# Altium PCB Tigershark 3D R1.2.PcbDoc (part 2 of 3)
Units mil, origin at the board's own origin, x right, y up, seen from the top; angles counter-clockwise.
Board outline 6000 x 4500 mil, 4 copper layers (Top Layer, Groun Plane, Power Plane, Bottom Layer); 257 components, 247 nets, 1014 pads, 620 vias.
Unrouted connection lines stored in the file: 332.
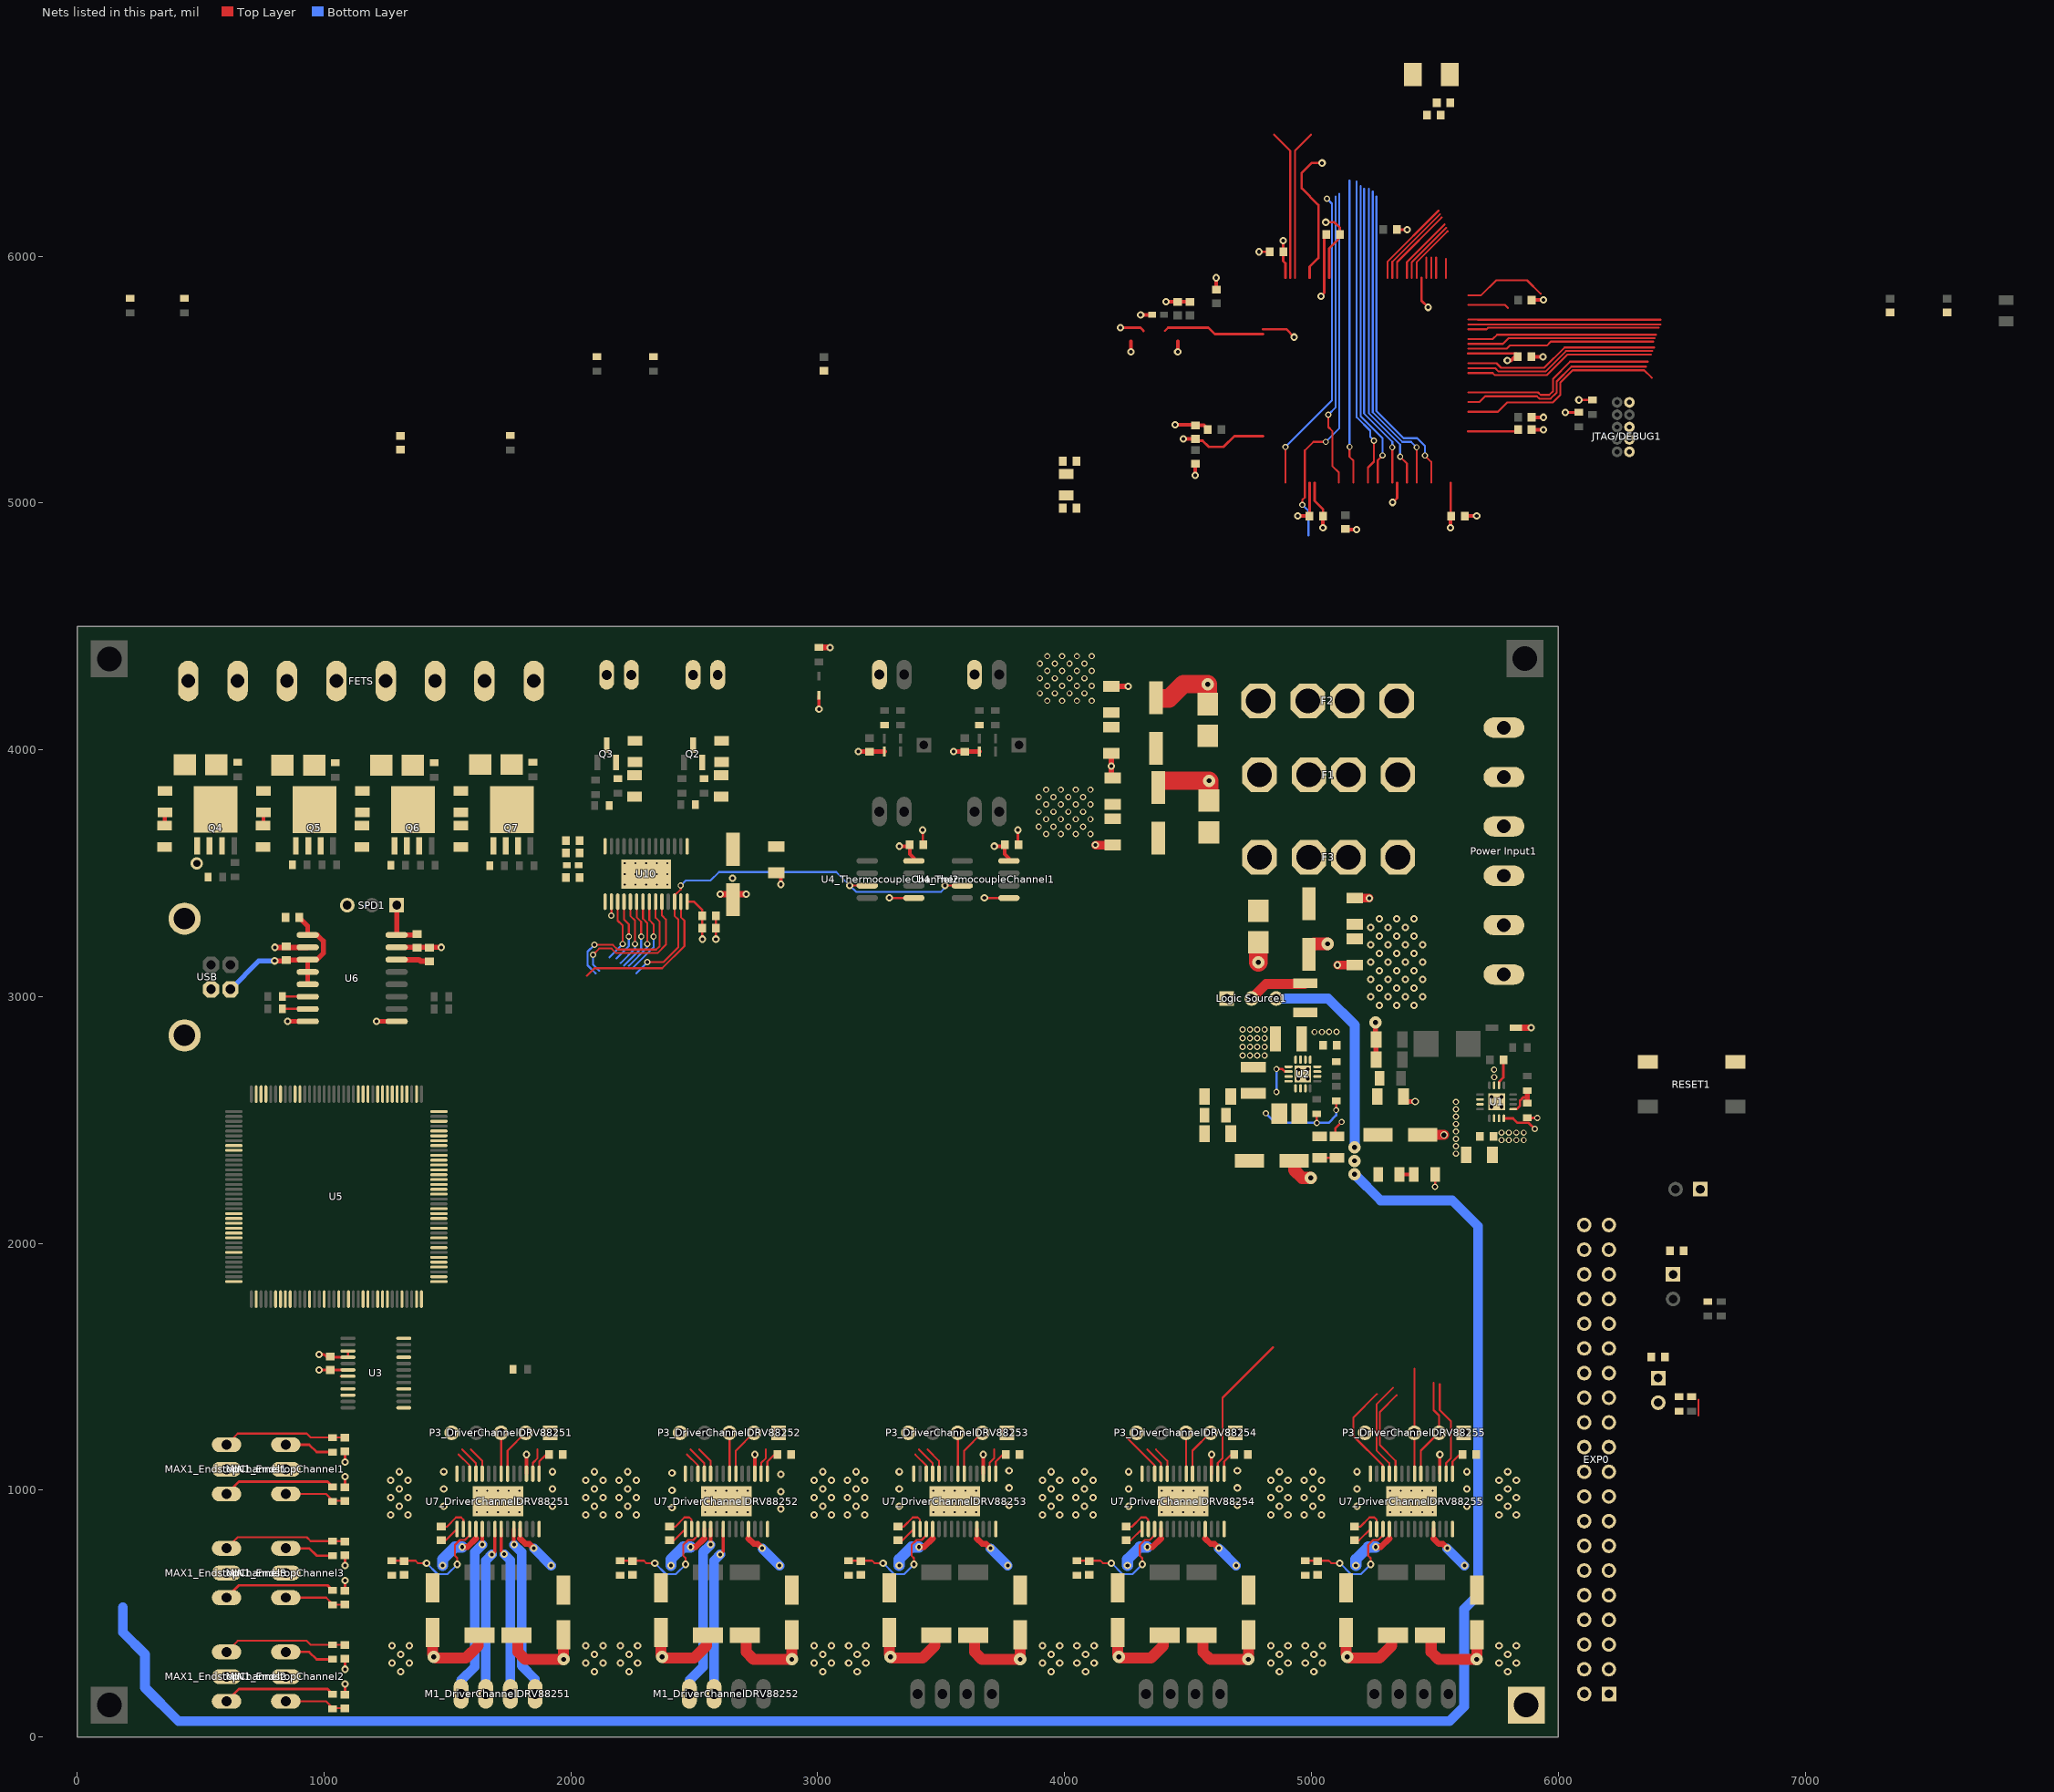
[diagram p4: the nets of this part, all layers, seen from the top]

## Via types
v1: diameter 30, hole 15, Top Layer to Bottom Layer, 351 vias
v2: diameter 25, hole 15, Top Layer to Bottom Layer, 156 vias
v3: diameter 19.68, hole 7.87, Top Layer to Bottom Layer, 90 vias
v4: diameter 50, hole 20, Top Layer to Bottom Layer, 19 vias
v5: diameter 30, hole 20, Top Layer to Bottom Layer, 3 vias
v6: diameter 50, hole 28, Top Layer to Bottom Layer, 1 vias

## Nets (pads, with @x,y where several pads share a name; then routed paths per layer and width w, separated by ;. In a path a pad name is that pad's centre, name@x,y a point inside that pad or via, vN(x,y) a via of type N, cw(c..) or ccw(c..) an arc to the next point about the centre after c; other vN are vias at no path point)
3.3VCC: 1.1 C13.2 C23.1 C25.2 C26.1 C31_ThermocoupleChannel1.2 C31_ThermocoupleChannel2.2 C35.1 C45.2 C46.2 C47.2 C48.2 C49.2 C50.2 C51.2 C60.2 C61.2 C62.2 C64.2 EXP0.5 EXP0.7 FB3.2 FB5.1 FB9.1 JTAG/DEBUG1.1@6288.26,5208.02 MAX1_EndstopChannel1.3 MAX1_EndstopChannel2.3 MAX1_EndstopChannel3.3 MIN1_EndstopChannel1.3 MIN1_EndstopChannel2.3 MIN1_EndstopChannel3.3 P3_DriverChannelDRV88251.1 P3_DriverChannelDRV88252.1 P3_DriverChannelDRV88253.1 P3_DriverChannelDRV88254.1 P3_DriverChannelDRV88255.1 R2_EndstopChannel1.1 R2_EndstopChannel2.1 R2_EndstopChannel3.1 R3_EndstopChannel1.1 R3_EndstopChannel2.1 R3_EndstopChannel3.1 R11.2 R13_ThermistorChannel1.2 R13_ThermistorChannel2.2 R21.2 R24.2 R25.2 R26.2 R27.2 TRST1.1 U3.6 U4_ThermocoupleChannel1.4 U4_ThermocoupleChannel2.4 U5.30 U5.43 U5.72 U5.80 U5.96 U5.134 U5.143 U7_DriverChannelDRV88251.17 U7_DriverChannelDRV88252.17 U7_DriverChannelDRV88253.17 U7_DriverChannelDRV88254.17 U7_DriverChannelDRV88255.17 U10.28 | length 4767.4
  Top Layer w10: MAX1_EndstopChannel2.3@605,145 655,195 1014.05,195 R2_EndstopChannel2.1@1035,174.05 ; MAX1_EndstopChannel3.3@605,565 655,615 1014.05,615 R2_EndstopChannel3.1@1035,594.05 ; MAX1_EndstopChannel1.3@605,985 655,1035 1014.05,1035 R2_EndstopChannel1.1@1035,1014.05 ; MIN1_EndstopChannel2.3@845,345 940,345 970,315 R3_EndstopChannel2.1@1035,315 ; MIN1_EndstopChannel3.3@845,765 940,765 970,735 R3_EndstopChannel3.1@1035,735 ; MIN1_EndstopChannel1.3@845,1185 940,1185 970,1155 R3_EndstopChannel1.1@1035,1155 ; v1(980,1487.8) U3.6@1096.81,1487.8 ; U10.28@2471.18,3385 2498.11,3385 2532.28,3350.83 v1(2532.28,3233.27) ; v1(4225.82,5710.58) 4268.26,5710.58 4307.39,5710.58 4319.95,5698.02 ; C45.2@4524.36,5252.67 4559.36,5252.67 4584.36,5227.67 4644.36,5227.67 4687.98,5271.29 4804,5271.29 ; v1(4885.82,6063.02) 4885.82,5980.46 4894.56,5971.72 4894.56,5913.02 ; C48.2@4992.98,4947.67 4992.98,5082.31 ; v1(5058.26,6138.02) 5093.26,6138.02 5115.82,6115.46 C51.2@5115.82,6088.02 5115.82,6075.58 5071.72,6031.49 5071.72,5913.02 ; C50.2@5563.85,4947.67 5563.85,5082.31 ; 5634.71,5290.98 5830.11,5290.98 C47.2@5836.8,5297.67 ; 5634.71,5605.94 C46.2@5830.11,5605.94 ; v1(6028.73,5367.55) R26.2@6083.26,5367.55 ; v1(6083.26,5418.02) 6137.78,5418.02 R27.2@6138.26,5417.55
  Top Layer w14: U7_DriverChannelDRV88251.17@1820,1067.36 v1(1820,1145) ; U7_DriverChannelDRV88252.17@2745,1067.36 v1(2745,1145) ; U7_DriverChannelDRV88253.17@3670,1067.36 v1(3670,1145) ; U7_DriverChannelDRV88254.17@4595,1067.36 v1(4595,1145) ; U7_DriverChannelDRV88255.17@5520,1067.36 v1(5520,1145)
  Top Layer w15: v1(3330.51,3610) 3372.95,3610 3372.95,3577.56 3389.49,3561.02 U4_ThermocoupleChannel2.4@3389.49,3550 ; v1(3715.51,3610) 3757.95,3610 3757.95,3577.56 3774.49,3561.02 U4_ThermocoupleChannel1.4@3774.49,3550 ; v1(4308.26,5763.02) FB5.1@4354.63,5763.02 ; v1(4481.8,5260.11) C45.2@4529.36,5260.11 ; v1(4944.24,4947.67) C48.2@4991.8,4947.67 ; v1(5563.85,4900.11) C50.2@5563.85,4947.67 ; v1(5793.26,5578.02) 5808.26,5578.02 5823.26,5593.02 C46.2@5835.7,5593.02
+5VCC: "Logic Source1.3" C9.1 C34.1 EXP0.1 EXP0.3 FB2.2 R8.2 | length 9199.9
  Bottom Layer w40: 185,525 185,425 275,335 275,200 410,65 5560,65 5619,124 5619,519 5675,575 5675,2070 5570,2175 5280,2175 v4(5175,2280) ; 4857.45,2992.55 5067.45,2992.55 5175,2885 v4(5175,2390)
  other v4: 5175,2335
+12VCC1: C10.2 C11.2 C16.1 C18.2 C19.2 C66_DriverChannelDRV88251.1 C66_DriverChannelDRV88252.1 C66_DriverChannelDRV88253.1 C66_DriverChannelDRV88254.1 C66_DriverChannelDRV88255.1 C69_DriverChannelDRV88251.1 C69_DriverChannelDRV88252.1 C69_DriverChannelDRV88253.1 C69_DriverChannelDRV88254.1 C69_DriverChannelDRV88255.1 C70_DriverChannelDRV88251.1 C70_DriverChannelDRV88252.1 C70_DriverChannelDRV88253.1 C70_DriverChannelDRV88254.1 C70_DriverChannelDRV88255.1 D8.2 F3.2 R30_DriverChannelDRV88251.1 R30_DriverChannelDRV88252.1 R30_DriverChannelDRV88253.1 R30_DriverChannelDRV88254.1 R30_DriverChannelDRV88255.1 R31.2 U1.2 U1.3 U1.11 U7_DriverChannelDRV88251.4 U7_DriverChannelDRV88251.11 U7_DriverChannelDRV88252.4 U7_DriverChannelDRV88252.11 U7_DriverChannelDRV88253.4 U7_DriverChannelDRV88253.11 U7_DriverChannelDRV88254.4 U7_DriverChannelDRV88254.11 U7_DriverChannelDRV88255.4 U7_DriverChannelDRV88255.11 | length 2214.5
  Top Layer w14: 1615.43,804.43 U7_DriverChannelDRV88251.4@1615.43,842.8 ; 1794.57,804.43 U7_DriverChannelDRV88251.11@1794.57,842.8 ; 2540.43,804.43 U7_DriverChannelDRV88252.4@2540.43,842.8 ; 2719.57,804.43 U7_DriverChannelDRV88252.11@2719.57,842.8 ; 3465.43,804.43 U7_DriverChannelDRV88253.4@3465.43,842.8 ; 3644.57,804.43 U7_DriverChannelDRV88253.11@3644.57,842.8 ; 4390.43,804.43 U7_DriverChannelDRV88254.4@4390.43,842.8 ; 4569.57,804.43 U7_DriverChannelDRV88254.11@4569.57,842.8 ; 5315.43,804.43 U7_DriverChannelDRV88255.4@5315.43,842.8 ; 5494.57,804.43 U7_DriverChannelDRV88255.11@5494.57,842.8
  Top Layer w25: v1(1560,770) 1581,770 1615.43,804.43 ; 1794.57,804.43 1816,783 1832,783 v1(1850,765) ; v1(2485,770) 2506,770 2540.43,804.43 ; 2719.57,804.43 2741,783 2757,783 v1(2775,765) ; v1(3410,770) 3431,770 3465.43,804.43 ; 3644.57,804.43 3666,783 3682,783 v1(3700,765) ; v1(4335,770) 4356,770 4390.43,804.43 ; 4569.57,804.43 4591,783 4607,783 v1(4625,765) ; v1(5260,770) 5281,770 5315.43,804.43 ; 5494.57,804.43 5516,783 5532,783 v1(5550,765)
  Bottom Layer w39: v1(1850,765) v1(1920,695) ; v1(2775,765) v1(2845,695) ; v1(3700,765) v1(3770,695) ; v1(4625,765) v1(4695,695) ; v1(5550,765) v1(5620,695)
  Bottom Layer w45: v1(1480,695) 1480,720 1530,770 v1(1560,770) ; v1(2405,695) 2405,720 2455,770 v1(2485,770) ; v1(3330,695) 3330,720 3380,770 v1(3410,770) ; v1(4255,695) 4255,720 4305,770 v1(4335,770) ; v1(5180,695) 5180,720 5230,770 v1(5260,770)
  other v1: 1310,265 2095,265 2235,265 3020,265 3160,265 3945,265 4085,265 4870,265 5010,265 5795,265 1275,300 1345,300 2060,300 2130,300 2200,300 2270,300 2985,300 3055,300 3125,300 3195,300 3910,300 3980,300 4050,300 4120,300 4835,300 4905,300 4975,300 5045,300 5760,300 5830,300 1310,335 2095,335 2235,335 3020,335 3160,335 3945,335 4085,335 4870,335 5010,335 5795,335 1275,370 1345,370 2060,370 2130,370 2200,370 2270,370 2985,370 3055,370 3125,370 3195,370 3910,370 3980,370 4050,370 4120,370 4835,370 4905,370 4975,370 5045,370 5760,370 5830,370 5275,2965 5345,2965 5415,2965 5240,3000 5310,3000 5380,3000 5450,3000 5275,3035 5345,3035 5415,3035 5240,3070 5310,3070 5380,3070 5450,3070 5275,3105 5345,3105 5415,3105 5240,3140 5310,3140 5380,3140 5450,3140 5275,3175 5345,3175 5415,3175 5240,3210 5310,3210 5380,3210 5450,3210 5275,3245 5345,3245 5415,3245 5240,3280 5310,3280 5380,3280 5275,3315 5345,3315 5415,3315
  other v2: 5770,2419 5800,2419 5830,2419 5860,2419 5770,2449 5800,2449 5830,2449 5860,2449 5740.16,2674 5740,2704
+12VCC2: C3.1 C5.2 C6.2 C27.2 C28.1 D4.2 D15.2 D17.2 D19.2 F2.2 FAN-1.1 FAN-2.1 FETS.3 FETS.5 FETS.7 R1.2 R13.1 R47.1 R60.2 R64.2 R68.2 U10.1 | length 45.2
  Top Layer w8: R1.2@3005,4414.53 R1.2@3005.47,4415
  Top Layer w25: R1.2@3005.47,4415 v1(3050,4415)
  other v2: 3930,4199 3990,4199 4050,4199 4110,4199 3900,4229 3960,4229 4020,4229 4080,4229 3930,4259 3990,4259 4050,4259 4110,4259 3900,4290 3960,4290 4020,4290 4080,4290 3930,4320 3990,4320 4050,4320 4110,4320 3900,4350 3960,4350 4020,4350 4080,4350 3930,4380 3990,4380 4050,4380 4110,4380
+12VCC3: C12.1 C14.2 C15.2 D6.2 D12.2 F1.2 FETS.1 R56.2
  other v2: 3925,3659 3985,3659 4045,3659 4105,3659 3895,3689 3955,3689 4015,3689 4075,3689 3925,3719 3985,3719 4045,3719 4105,3719 3895,3749 3955,3749 4015,3749 4075,3749 3925,3779 3985,3779 4045,3779 4105,3779 3895,3809 3955,3809 4015,3809 4075,3809 3925,3839 3985,3839 4045,3839 4105,3839
ADC_TRIGGER: U5.36
ATSAM_SS: U5.64
AVREF: C65.2 FB9.2 U5.9 | length 413.4
  Top Layer w8: 4406.56,5698.02 4419.12,5710.58
  Top Layer w10: 4419.12,5710.58 4458.26,5710.58 4582.7,5710.58 4608.61,5684.68 4804,5684.68
BED_PWM: U5.52 U10.17 | length 1487.9
  Top Layer w8: U10.17@2189.68,3385 2189.68,3308.43 2209.84,3288.27 v2(2209.84,3213.27) ; v2(5154.36,5227.67) 5154.36,5187.67 5170.15,5171.88 5170.15,5082.31
  Bottom Layer w8: 2156.1,3159.53 v2(2209.84,3213.27) ; v2(5154.36,5227.67) 5154.36,6307.55
BST: C7.2 U1.10 | length 110.4
  Top Layer w10: U1.10@5759.84,2640.93 5759.84,2654.59 5777.56,2672.3 C7.2@5777.56,2744
DIR1: P3_DriverChannelDRV88251.2 U5.78 U7_DriverChannelDRV88251.20 | length 198.5
  Top Layer w8: U7_DriverChannelDRV88251.20@1743.39,1067.2 1743.39,1160.89 P3_DriverChannelDRV88251.2@1817.5,1235
DIR2: P3_DriverChannelDRV88252.2 U5.93 U7_DriverChannelDRV88252.20 | length 985.4
  Top Layer w8: U7_DriverChannelDRV88252.20@2668.39,1067.2 2668.39,1160.89 P3_DriverChannelDRV88252.2@2742.5,1235 ; 5634.71,5546.88 5744.4,5546.88 5758.26,5533.02 5948.06,5533.02 6031.06,5616.02 6381.47,5616.02
DIR3: P3_DriverChannelDRV88253.2 U5.102 U7_DriverChannelDRV88253.20 | length 977.2
  Top Layer w8: U7_DriverChannelDRV88253.20@3593.39,1067.2 3593.39,1160.89 P3_DriverChannelDRV88253.2@3667.5,1235 ; 5634.71,5724.05 6413.45,5724.05
DIR4: P3_DriverChannelDRV88254.2 U5.113 U7_DriverChannelDRV88254.20 | length 280.1
  Top Layer w8: U7_DriverChannelDRV88254.20@4518.39,1067.2 4518.39,1160.89 P3_DriverChannelDRV88254.2@4592.5,1235 ; 5485.11,5913.02 5485.11,5994.67
DIR5: P3_DriverChannelDRV88255.2 U5.121 U7_DriverChannelDRV88255.20 | length 747.3
  Top Layer w8: 5327.63,5913.02 5327.63,5977.39 5521.26,6171.02 ; U7_DriverChannelDRV88255.20@5443.39,1067.2 5443.39,1160.89 P3_DriverChannelDRV88255.2@5517,1234.5 ; 5495,1435.2 5495,1325 5517,1303 P3_DriverChannelDRV88255.2@5517,1234.5 ; P3_DriverChannelDRV88255.2@5517,1233 P3_DriverChannelDRV88255.2@5517,1234.5
DM_N: R18.1 U6.6 | length 101.4
  Top Layer w10: R18.1@831.53,3001 U6.6@932.88,3001
DP_P: R20.1 U6.7 | length 101.4
  Top Layer w8: R20.1@831.53,2951 U6.7@932.88,2951
DRV_RESET1: U5.82 U7_DriverChannelDRV88251.16 | length 105.8
  Top Layer w8: U7_DriverChannelDRV88251.16@1845.75,1067.2 1845.75,1110.75 1865,1130 1865,1165
DRV_RESET2: U5.94 U7_DriverChannelDRV88252.16 | length 901.4
  Top Layer w8: U7_DriverChannelDRV88252.16@2770.75,1067.2 2770.75,1110.75 2790,1130 2790,1165 ; 5634.71,5566.57 5749.71,5566.57 5768.26,5548.02 5943.26,5548.02 6025.26,5630.02 6388.68,5630.02
DRV_RESET3: U5.103 U7_DriverChannelDRV88253.16 | length 885.6
  Top Layer w8: U7_DriverChannelDRV88253.16@3695.75,1067.2 3695.75,1110.75 3715,1130 3715,1165 ; 5634.71,5743.73 5673.97,5743.73 5674.67,5743.02 6414.27,5743.02
DRV_RESET4: U5.114 U7_DriverChannelDRV88254.16 | length 687.8
  Top Layer w8: U7_DriverChannelDRV88254.16@4620.75,1067.2 4620.75,1110.75 4640,1130 4640,1375 4845,1580 ; 5465.42,5913.02 5465.42,5995.19
DRV_RESET5: U5.122 U7_DriverChannelDRV88255.16 | length 747.3
  Top Layer w8: 5307.94,5913.02 5307.94,5977.71 5515.26,6185.02 ; 5520,1430 5520,1325 5565,1280 5565,1130 5545.75,1110.75 U7_DriverChannelDRV88255.16@5545.75,1067.2
EN1: P3_DriverChannelDRV88251.3 U5.76 U7_DriverChannelDRV88251.21 | length 165.8
  Top Layer w8: U7_DriverChannelDRV88251.21@1717.8,1067.2 P3_DriverChannelDRV88251.3@1717.8,1233
EN2: P3_DriverChannelDRV88252.3 U5.92 U7_DriverChannelDRV88252.21 | length 944.4
  Top Layer w8: U7_DriverChannelDRV88252.21@2642.8,1067.2 P3_DriverChannelDRV88252.3@2642.8,1233 ; 5634.71,5527.2 5734.08,5527.2 5743.26,5518.02 5952.85,5518.02 6036.85,5602.02 6374.77,5602.02
EN3: P3_DriverChannelDRV88253.3 U5.101 U7_DriverChannelDRV88253.21 | length 941.1
  Top Layer w8: U7_DriverChannelDRV88253.21@3567.8,1067.2 P3_DriverChannelDRV88253.3@3567.8,1233 ; 5634.71,5704.36 5709.59,5704.36 5715.28,5710.05 6407.65,5710.05
EN4: P3_DriverChannelDRV88254.3 U5.112 U7_DriverChannelDRV88254.21 | length 247.3
  Top Layer w8: U7_DriverChannelDRV88254.21@4492.8,1067.2 P3_DriverChannelDRV88254.3@4492.8,1233 ; 5504.79,5913.02 5504.79,5994.56
EN5: P3_DriverChannelDRV88255.3 U5.120 U7_DriverChannelDRV88255.21 | length 744.8
  Top Layer w8: 5347.31,5913.02 5347.31,5976.88 5527.46,6157.02 ; P3_DriverChannelDRV88255.3@5417,1233 5417,1493.4 ; U7_DriverChannelDRV88255.21@5417.8,1067.2 P3_DriverChannelDRV88255.3@5417.8,1233
ERASE: U5.87
EXP_CS: U5.45
FB: R7.1 R10.2 U1.5 | length 134.9
  Top Layer w10: U1.5@5816.93,2544.47 5830.59,2544.47 5845,2558.89 5845,2579 5857.74,2591.74 5875,2591.74
  Top Layer w20: R10.2@5875,2569 R7.1@5875,2614.47
FET_CS: U5.49 U10.23 | length 1796.4
  Top Layer w8: v2(2095,3210) 2170,3210 2189.23,3190.77 2345.77,3190.77 2359.84,3204.84 2359.84,3303.27 2343.23,3319.88 U10.23@2343.23,3385 ; v2(5068.26,5358.02) 5068.26,5308.02 5084.36,5291.92 5084.36,5150.7 5111.09,5123.97 5111.09,5082.31
  Bottom Layer w8: v2(2095,3210) 2067.5,3182.5 2067.5,3127.5 2100,3095 ; v2(5068.26,5358.02) 5098.26,5388.02 5098.26,6243.02
FET_PWM1: U5.65 U10.22 | length 1587.4
  Top Layer w8: U10.22@2317.64,3385 2317.64,3310.47 2334.84,3293.27 v2(2334.84,3243.27) ; 5426.05,5082.31 v2(5426.05,5225.98)
  Bottom Layer w8: 2250,3115 2334.84,3199.84 v2(2334.84,3243.27) ; 5248.26,6263.02 5248.26,5368.22 5368.46,5248.02 5404,5248.02 v2(5426.05,5225.98)
FET_PWM2: U5.63 U10.21 | length 1552.6
  Top Layer w8: U10.21@2292.05,3385 2292.05,3316.26 2309.84,3298.47 v2(2309.84,3213.27) ; v2(5359.36,5187.67) 5386.68,5160.35 5386.68,5082.31
  Bottom Layer w8: 2235,3125 2309.84,3199.84 v2(2309.84,3213.27) ; 5233.26,6273.02 5233.26,5363.02 5359.36,5236.92 v2(5359.36,5187.67)
FET_PWM3: U5.60 U10.20 | length 1534.6
  Top Layer w8: U10.20@2266.46,3385 2266.46,3322.06 2284.84,3303.67 v2(2284.84,3243.27) ; 5327.63,5082.31 v2(5327.63,5225.94)
  Bottom Layer w8: 2215,3125.47 2284.84,3195.32 v2(2284.84,3243.27) ; 5213.26,6273.5 5213.26,5363.02 5327.63,5248.65 v2(5327.63,5225.94)
FET_PWM4: U5.57 U10.19 | length 1528
  Top Layer w8: U10.19@2240.87,3385 2240.87,3327.85 2259.84,3308.87 v2(2259.84,3213.27) ; 5268.57,5082.31 5268.57,5173.34 v2(5288.26,5193.02)
  Bottom Layer w8: 2201,3136 2259.84,3194.84 v2(2259.84,3213.27) ; 5199.26,6284.02 5199.26,5352.02 5288.26,5263.02 v2(5288.26,5193.02)
FET_PWM5: U5.55 U10.18 | length 1518.4
  Top Layer w8: U10.18@2215.28,3385 2215.28,3312.83 2234.84,3293.27 v2(2234.84,3243.27) ; 5229.2,5082.31 5229.2,5143.97 5253.26,5168.02 v2(5253.26,5253.02)
  Bottom Layer w8: 2185,3155 2234.84,3204.84 v2(2234.84,3243.27) ; 5183.26,6303.02 5183.26,5348.02 5238.26,5293.02 5238.26,5268.02 v2(5253.26,5253.02)
FET_RESET: U5.38 U10.27 | length 1867.6
  Top Layer w8: 2065,3085 2095,3115 2369.8,3115 2459.84,3205.04 2459.84,3308.27 2445.59,3322.52 U10.27@2445.59,3385 ; 4894.56,5082.31 v2(4894.56,5227.47)
  Bottom Layer w8: v2(4894.56,5227.47) 5083.26,5416.17 5083.26,6213.02 v2(5063.26,6233.02)
GND: "Power Input1.2" "Power Input1.4" "Power Input1.6" C1_EndstopChannel1.2 C1_EndstopChannel2.2 C1_EndstopChannel3.2 C2_EndstopChannel1.2 C2_EndstopChannel2.2 C2_EndstopChannel3.2 C3.2 C4.2 C5.1 C6.1 C8.1 C9.2 C10.1 C11.1 C12.2 C13.1 C14.1 C15.1 C16.2 C17.2 C18.1 C19.1 C20.1 C21.1 C22.2 C23.2 C24.1 C25.1 C26.2 C27.1 C28.2 C29.2 C30_ThermistorChannel1.1 C30_ThermistorChannel2.1 C31_ThermocoupleChannel1.1 C31_ThermocoupleChannel2.1 C32.1 C33.1 C34.2 C35.2 C36.1 C37.1 C38.1 C39.1 C40.1 C41.1 C42.1 C43.1 C44.1 C45.1 C46.1 C47.1 C48.1 C49.1 C50.1 C51.1 C52.2 C54.1 C55.1 C56.1 C57.1 C60.1 C61.1 C62.1 C63.1 C64.1 C65.1 C69_DriverChannelDRV88251.2 C69_DriverChannelDRV88252.2 C69_DriverChannelDRV88253.2 C69_DriverChannelDRV88254.2 C69_DriverChannelDRV88255.2 C70_DriverChannelDRV88251.2 C70_DriverChannelDRV88252.2 C70_DriverChannelDRV88253.2 C70_DriverChannelDRV88254.2 C70_DriverChannelDRV88255.2 C71_DriverChannelDRV88251.1 C71_DriverChannelDRV88252.1 C71_DriverChannelDRV88253.1 C71_DriverChannelDRV88254.1 C71_DriverChannelDRV88255.1 D1.1 D4.1 D5.1 D6.1 D7.1 D8.1 D9.1 D12_ThermistorChannel1.1 D12_ThermistorChannel2.1 EXP0.2 EXP0.4 EXP0.6 EXP0.8 JTAG/DEBUG1.3 JTAG/DEBUG1.5 JTAG/DEBUG1.9 MAX1_EndstopChannel1.2 MAX1_EndstopChannel2.2 MAX1_EndstopChannel3.2 MIN1_EndstopChannel1.2 MIN1_EndstopChannel2.2 MIN1_EndstopChannel3.2 P2_ThermistorChannel1.2 P2_ThermistorChannel2.2 P3_DriverChannelDRV88251.5 P3_DriverChannelDRV88252.5 P3_DriverChannelDRV88253.5 P3_DriverChannelDRV88254.5 P3_DriverChannelDRV88255.5 pad.@5870,130 Q2.2 Q3.2 Q4.1 Q4.2 Q4.3 Q5.1 Q5.2 Q5.3 Q6.1 Q6.2 Q6.3 Q7.1 Q7.2 Q7.3 R10.1 R15.2 R28.1 R29.2 R32_DriverChannelDRV88251.1 R32_DriverChannelDRV88252.1 R32_DriverChannelDRV88253.1 R32_DriverChannelDRV88254.1 R32_DriverChannelDRV88255.1 R33_DriverChannelDRV88251.1 R33_DriverChannelDRV88252.1 R33_DriverChannelDRV88253.1 R33_DriverChannelDRV88254.1 R33_DriverChannelDRV88255.1 R38.1 R46.2 R55.2 R59.2 R63.2 R67.2 R71.2 RESET1.2 SPD1.3 U1.4 U1.14 U1.15 U1.17 U2.6 U2.7 U2.8 U2.15 U2.16 U2.17 U3.3 U3.4 U3.9 U3.10 U3.13 U3.16 U3.21 U3.24 U4_ThermocoupleChannel1.1 U4_ThermocoupleChannel2.1 U5.8 U5.44 U5.61 U5.95 U5.104 U5.115 U5.135 U5.138 U6.9 U6.15 U7_DriverChannelDRV88251.14 U7_DriverChannelDRV88251.28 U7_DriverChannelDRV88251.29 U7_DriverChannelDRV88252.14 U7_DriverChannelDRV88252.28 U7_DriverChannelDRV88252.29 U7_DriverChannelDRV88253.14 U7_DriverChannelDRV88253.28 U7_DriverChannelDRV88253.29 U7_DriverChannelDRV88254.14 U7_DriverChannelDRV88254.28 U7_DriverChannelDRV88254.29 U7_DriverChannelDRV88255.14 U7_DriverChannelDRV88255.28 U7_DriverChannelDRV88255.29 U10.16 U10.29 | length 9037
  Top Layer w10: v1(980,1550) 1000,1550 1011.02,1538.98 C13.1@1025,1538.98 ; C13.1@1028.58,1538.98 U3.4@1096.81,1538.98 U3.3@1096.81,1564.57 ; C1_EndstopChannel2.2@1085,172.09 v1(1085,215) ; v1(1085,275) C2_EndstopChannel2.2@1085,317.44 ; C1_EndstopChannel3.2@1085,592.09 v1(1085,635) ; v1(1085,695) C2_EndstopChannel3.2@1085,737.44 ; C1_EndstopChannel1.2@1085,1012.09 v1(1085,1055) ; v1(1085,1115) C2_EndstopChannel1.2@1085,1157.44 ; v2(2164.09,3329.02) U10.16@2164.09,3385 ; v1(2587.4,3233.27) C26.2@2587.4,3327.2 ; v1(3290,3400) U4_ThermocoupleChannel2.1@3389.49,3400 ; C31_ThermocoupleChannel2.1@3425.51,3617.56 v1(3425.51,3675) ; v1(3675,3400) U4_ThermocoupleChannel1.1@3774.49,3400 ; C31_ThermocoupleChannel1.1@3810.51,3617.56 v1(3810.51,3675) ; v1(4788.26,6018.02) C49.1@4830.7,6018.02 ; 4804,5704.36 4897.67,5704.36 v1(4929.36,5672.67) ; 4992.98,5913.02 4992.98,5957.75 5028.26,5993.02 5028.26,6208.02 4960.82,6275.46 4960.82,6328.02 4960.82,6338.02 5000.82,6378.02 v1(5043.26,6378.02) ; 5012.67,5082.31 5012.67,5009.36 5046.92,4975.11 C48.1@5046.92,4947.67 ; v1(5038.26,5838.02) 5052.04,5851.8 5052.04,5913.02 5052.04,6079.36 C51.1@5060.7,6088.02 ; C51.1@5052.04,6088.02 C51.1@5052.04,6093.02 ; D9.1@5103.94,2434.21 5097.45,2440.7 5097.45,2467.55 v2(5122.45,2492.55) ; v1(5329.36,5002.67) 5347.31,5020.62 5347.31,5082.31 ; C37.1@5345.82,6108.02 v1(5388.26,6108.02) ; 5445.74,5913.02 5445.74,5820.54 v1(5473.26,5793.02) ; v2@5501.62,2231.62 D7.1@5501.62,2280 ; U1.4@5779.53,2507.07 5816.93,2507.07 5835,2489 5880,2489 v2(5905,2464) ; R10.1@5875.47,2509 v2(5915,2509)
  Top Layer w12: v1(3005,4164.53) D1.1@3005,4220.63
  Top Layer w15: C27.1@2832.28,3502.17 2850,3484.45 v1(2850,3455) ; v1(4268.26,5613.02) 4268.26,5655.46 ; v1(4410.7,5815.58) C54.1@4458.26,5815.58 C55.1@4508.26,5815.58 ; v1(4448.26,5318.02) C45.1@4526.56,5318.02 ; v1(4458.26,5613.02) 4458.26,5655.46 ; v1(4529.36,5112.55) C39.1@4529.36,5160.11 ; C45.1@4529.36,5315.23 4563.49,5315.23 C42.1@4580.7,5298.02 ; C38.1@4614.36,5865.23 v1(4614.36,5912.79) ; v1(5046.92,4900.11) C48.1@5046.92,4947.67 ; C41.1@5135.82,4893.02 v1(5183.37,4893.02) ; C50.1@5621.92,4947.67 v1(5669.48,4947.67) ; C46.1@5890.82,5593.02 v1(5938.37,5593.02) ; C47.1@5891.92,5297.67 v1(5939.48,5297.67) ; C36.1@5891.92,5347.67 v1(5939.48,5347.67) ; C40.1@5891.92,5822.67 v1(5939.48,5822.67)
  Top Layer w20: v1(1213,2900) U6.9@1294.12,2900 ; U6.15@1294.12,3200 v1(1475,3200) ; v1(3165,3993.43) D12_ThermistorChannel2.1@3270,3993.43 ; v1(3550,3993.43) D12_ThermistorChannel1.1@3655,3993.43 ; C8.1@5260,2827.85 v4(5260,2895) ; C29.2@5261.85,2745 C8.1@5261.85,2826 ; C34.2@5373.15,2575 v5(5420,2575)
  Top Layer w22: C14.1@4190,3890.81 C6.1@4190,3985.85 ; C5.1@4190,4257.15 v1(4258.15,4257.15)
  Top Layer w25: v1(2605,3415) v1(2710,3415) ; D5.1@5828.23,2874 v1(5890,2874)
  Top Layer w35: v1(4125,3614.51) C15.1@4195,3614.51 ; v1(5105.79,3128.21) C18.1@5175,3128.21 ; C19.1@5175,3399.51 v1@5234.49,3399.51
  Top Layer w40: C9.2@5490,2440 v5(5536.85,2440)
  Top Layer w45: C69_DriverChannelDRV88251.2@1440,414.45 1440,335 1455,320 1575,320 1625,370 R33_DriverChannelDRV88251.1@1625,412.05 ; R32_DriverChannelDRV88251.1@1785,412.05 1785,345 1815,315 v4(1970,315) C70_DriverChannelDRV88251.2@1970,414.45 ; C69_DriverChannelDRV88252.2@2365,414.45 2365,335 2380,320 2500,320 2550,370 R33_DriverChannelDRV88252.1@2550,412.05 ; R32_DriverChannelDRV88252.1@2710,412.05 2710,345 2740,315 v4(2895,315) C70_DriverChannelDRV88252.2@2895,414.45 ; C69_DriverChannelDRV88253.2@3290,414.45 3290,335 3305,320 3425,320 3475,370 R33_DriverChannelDRV88253.1@3475,412.05 ; R32_DriverChannelDRV88253.1@3635,412.05 3635,345 3665,315 v4(3820,315) C70_DriverChannelDRV88253.2@3820,414.45 ; C69_DriverChannelDRV88254.2@4215,414.45 4215,335 4230,320 4350,320 4400,370 R33_DriverChannelDRV88254.1@4400,412.05 ; R32_DriverChannelDRV88254.1@4560,412.05 4560,345 4590,315 v4(4745,315) C70_DriverChannelDRV88254.2@4745,414.45 ; C69_DriverChannelDRV88255.2@5140,414.45 5140,335 5155,320 5275,320 5325,370 R33_DriverChannelDRV88255.1@5325,412.05 ; R32_DriverChannelDRV88255.1@5485,412.05 5485,345 5515,315 v4(5670,315) C70_DriverChannelDRV88255.2@5670,414.45
  Top Layer w50: C23.2@4930,2335 4930,2298.18 4962.45,2265.73 v4(4997.45,2265.73) ; C16.2@4990,3171.64 4990,3194 5010,3214 v4(5065,3214)
  Top Layer w75: C3.2@4385,4209 4423.5,4209 4480.86,4266.36 v4(4580,4266.36) D4.1@4580,4185.34 ; 4407.64,3875.02 v4(4585,3875.02) D6.1@4585,3794 ; v4(4785,3139) D8.1@4785,3220.02
  other v1: 1270,900 1340,900 2060,900 2130,900 2195,900 2265,900 2985,900 3055,900 3120,900 3190,900 3910,900 3980,900 4045,900 4115,900 4835,900 4905,900 4970,900 5040,900 5760,900 5830,900 2850,925 2410,930 1305,935 1485,935 1925,935 2095,935 2230,935 3020,935 3155,935 3330,935 3945,935 4080,935 4260,935 4870,935 5005,935 5185,935 5630,935 5795,935 3775,940 4700,940 1270,970 1340,970 2060,970 2130,970 2195,970 2265,970 2985,970 3055,970 3120,970 3190,970 3910,970 3980,970 4045,970 4115,970 4835,970 4905,970 4970,970 5040,970 5760,970 5830,970 2850,995 2410,1000 1305,1005 1485,1005 1925,1005 2095,1005 2230,1005 3020,1005 3155,1005 3330,1005 3945,1005 4080,1005 4260,1005 4870,1005 5005,1005 5185,1005 5630,1005 5795,1005 3775,1010 4700,1010 1270,1040 1340,1040 2060,1040 2130,1040 2195,1040 2265,1040 2985,1040 3055,1040 3120,1040 3190,1040 3910,1040 3980,1040 4045,1040 4115,1040 4835,1040 4905,1040 4970,1040 5040,1040 5760,1040 5830,1040 2850,1065 2410,1070 1305,1075 1485,1075 1925,1075 2095,1075 2230,1075 3020,1075 3155,1075 3330,1075 3945,1075 4080,1075 4260,1075 4870,1075 5005,1075 5185,1075 5630,1075 5795,1075 3775,1080 4700,1080 5235,3399 2655,3480 4190,3934
  other v2: 5500,2230.01 5585,2364 5585,2394 5585,2424 5585,2454 5585,2484 5585,2514 5585,2544 5730,2554 5770,2554 5585,2574 5730,2594 5770,2594 4946.45,2667.82 4984.45,2667.82 4947.45,2704.82 4984.45,2705.82 4721.45,2761.82 4751.45,2761.82 4780.45,2761.82 4810.45,2761.82 4721.45,2796.82 4751.45,2796.82 4780.45,2796.82 4810.45,2796.82 4721.45,2831.82 4751.45,2831.82 4780.45,2831.82 4810.45,2831.82 5012.45,2856.82 5042.45,2856.82 5071.45,2857.82 5101.45,2857.82 4721.45,2866.82 4751.45,2866.82 4780.45,2866.82 4810.45,2866.82
  other v3: 1618.39,911.69 1661.69,911.69 1705,911.69 1748.31,911.69 1791.61,911.69 2543.39,911.69 2586.69,911.69 2630,911.69 2673.31,911.69 2716.61,911.69 3468.39,911.69 3511.69,911.69 3555,911.69 3598.31,911.69 3641.61,911.69 4393.39,911.69 4436.69,911.69 4480,911.69 4523.31,911.69 4566.61,911.69 5318.39,911.69 5361.69,911.69 5405,911.69 5448.31,911.69 5491.61,911.69 1618.39,955 1661.69,955 1705,955 1748.31,955 1791.61,955 2543.39,955 2586.69,955 2630,955 2673.31,955 2716.61,955 3468.39,955 3511.69,955 3555,955 3598.31,955 3641.61,955 4393.39,955 4436.69,955 4480,955 4523.31,955 4566.61,955 5318.39,955 5361.69,955 5405,955 5448.31,955 5491.61,955 1618.39,998.31 1661.69,998.31 1705,998.31 1748.31,998.31 1791.61,998.31 2543.39,998.31 2586.69,998.31 2630,998.31 2673.31,998.31 2716.61,998.31 3468.39,998.31 3511.69,998.31 3555,998.31 3598.31,998.31 3641.61,998.31 4393.39,998.31 4436.69,998.31 4480,998.31 4523.31,998.31 4566.61,998.31 5318.39,998.31 5361.69,998.31 5405,998.31 5448.31,998.31 5491.61,998.31 2218.23,3453.9 2261.54,3453.9 2304.84,3453.9 2348.15,3453.9 2391.46,3453.9 2218.23,3497.2 2261.54,3497.2 2304.84,3497.2 2348.15,3497.2 2391.46,3497.2 2218.23,3540.51 2261.54,3540.51 2304.84,3540.51 2348.15,3540.51 2391.46,3540.51
  other v4: 1445,325 2370,325 3295,325 4220,325 5145,325
  other v6: 485,3540
I2C_SCL: U5.77
I2C_SDA: U5.91
INPUT_GND: C58.1 C59.1 U6.2 U6.8 USB.4 USB.5 USB.6 | length 214
  Top Layer w20: v1(852.76,2900) U6.8@933.88,2900
  Top Layer w22: v1(801,3200) U6.2@933.88,3200
KRESET: kRESET.1
MAX_ES1: C2_EndstopChannel1.1 MAX1_EndstopChannel1.1 R3_EndstopChannel1.2 U5.22 | length 505.9
  Top Layer w8: MAX1_EndstopChannel1.1@605,1185 650,1230 930,1230 945.94,1214.06 R3_EndstopChannel1.2@1035,1214.06 1083.5,1214.06 C2_EndstopChannel1.1@1085,1212.56
MAX_ES2: C2_EndstopChannel2.1 MAX1_EndstopChannel2.1 R3_EndstopChannel2.2 U5.26 | length 505.9
  Top Layer w8: MAX1_EndstopChannel2.1@605,345 650,390 930,390 945.94,374.05 R3_EndstopChannel2.2@1035,374.05 1083.5,374.05 C2_EndstopChannel2.1@1085,372.56
MAX_ES3: C2_EndstopChannel3.1 MAX1_EndstopChannel3.1 R3_EndstopChannel3.2 U5.24 | length 505.9
  Top Layer w8: MAX1_EndstopChannel3.1@605,765 650,810 930,810 945.94,794.06 R3_EndstopChannel3.2@1035,794.06 1083.5,794.06 C2_EndstopChannel3.1@1085,792.56
MIN_ES1: C1_EndstopChannel1.1 MIN1_EndstopChannel1.1 R2_EndstopChannel1.2 U5.23 | length 251.6
  Top Layer w8: MIN1_EndstopChannel1.1@845,985 1008.94,985 1036.97,956.97 C1_EndstopChannel1.1@1085,956.97
MIN_ES2: C1_EndstopChannel2.1 MIN1_EndstopChannel2.1 R2_EndstopChannel2.2 U5.27 | length 251.6
  Top Layer w8: MIN1_EndstopChannel2.1@845,145 1008.94,145 1036.97,116.97 C1_EndstopChannel2.1@1085,116.97
MIN_ES3: C1_EndstopChannel3.1 MIN1_EndstopChannel3.1 R2_EndstopChannel3.2 U5.25 | length 251.6
  Top Layer w8: MIN1_EndstopChannel3.1@845,565 1008.94,565 1036.97,536.97 C1_EndstopChannel3.1@1085,536.97
MISO: U4_ThermocoupleChannel1.7 U4_ThermocoupleChannel2.7 U5.68 U10.26 | length 3048
  Top Layer w8: v2(2310,3140) 2375,3140 2434.84,3199.84 2434.84,3313.27 2420,3328.11 U10.26@2420,3385 2420,3410 2445,3435 v2(2445,3450) ; v1(3130,3450) U4_ThermocoupleChannel2.7@3200.51,3450 ; v1(3515,3450) U4_ThermocoupleChannel1.7@3585.51,3450 ; v2(5459.36,5192.67) 5485.11,5166.92 5485.11,5082.31
  Bottom Layer w8: 2265,3095 v2(2310,3140) ; v2(2445,3450) 2465.84,3470.84 2565.84,3470.84 2600,3505 3075,3505 v1(3130,3450) 3155,3425 3500,3425 3515,3440 v1(3515,3450) ; 5263.26,6243.02 5263.26,5373.02 5373.26,5263.02 5428.46,5263.02 5459.36,5232.12 v2(5459.36,5192.67)
MOD0E1: U5.74 U7_DriverChannelDRV88251.24 | length 116.9
  Top Layer w8: 1595,1165 1641.02,1118.98 U7_DriverChannelDRV88251.24@1641.02,1067.2
MOD0E2: U5.88 U7_DriverChannelDRV88252.24 | length 934.4
  Top Layer w8: 2520,1165 2566.02,1118.98 U7_DriverChannelDRV88252.24@2566.02,1067.2 ; 5634.71,5448.46 5917.82,5448.46 5928.26,5438.02 5963.26,5438.02 5979.26,5454.02 5979.26,5504.02 6048.26,5573.02 6362.75,5573.02
MOD0E3: U5.99 U7_DriverChannelDRV88253.24 | length 885.3
  Top Layer w8: 3445,1165 3491.02,1118.98 U7_DriverChannelDRV88253.24@3491.02,1067.2 ; 5634.71,5664.99 5735.22,5664.99 5752.28,5682.05 6396.06,5682.05
MOD0E4: U5.110 U7_DriverChannelDRV88254.24 | length 192.8
  Top Layer w8: 4370,1165 4416.02,1118.98 U7_DriverChannelDRV88254.24@4416.02,1067.2 ; 5544.16,5913.02 5544.16,5988.93
MOD0E5: U5.118 U7_DriverChannelDRV88255.24 | length 651.3
  Top Layer w8: U7_DriverChannelDRV88255.24@5341.02,1067.2 5341.02,1118.98 5277.47,1182.53 5277.47,1317.47 5345,1385 ; 5386.68,5913.02 5386.68,5976.45 5539.26,6129.02
MOD1E1: U5.73 U7_DriverChannelDRV88251.25 | length 120.8
  Top Layer w8: 1560,1165 1615.43,1109.57 U7_DriverChannelDRV88251.25@1615.43,1067.2
MOD1E2: U5.86 U7_DriverChannelDRV88252.25 | length 934.8
  Top Layer w8: 2485,1165 2540.43,1109.57 U7_DriverChannelDRV88252.25@2540.43,1067.2 ; 5634.71,5409.09 5679.32,5409.09 5703.26,5433.02 5913.26,5433.02 5923.26,5423.02 5968.26,5423.02 5993.26,5448.02 5993.26,5493.02 6053.26,5553.02 6354.47,5553.02
MOD1E3: U5.98 U7_DriverChannelDRV88253.25 | length 885.7
  Top Layer w8: 3410,1165 3465.43,1109.57 U7_DriverChannelDRV88253.25@3465.43,1067.2 ; 5634.71,5645.31 5775.54,5645.31 5798.28,5668.05 6390.26,5668.05
MOD1E4: U5.108 U7_DriverChannelDRV88254.25 | length 462.3
  Top Layer w8: 4335,1165 4390.43,1109.57 U7_DriverChannelDRV88254.25@4390.43,1067.2 ; 5634.71,5842.16 5687.39,5842.16 5748.26,5903.02 5873.26,5903.02 5928.26,5848.02
MOD1E5: U5.117 U7_DriverChannelDRV88255.25 | length 656.5
  Top Layer w8: U7_DriverChannelDRV88255.25@5315.43,1067.2 5315.43,1109.57 5263.47,1161.53 5263.47,1348.47 5330,1415 ; 5406.37,5913.02 5406.37,5975.93 5545.46,6115.02
MOD2E1: U5.71 U7_DriverChannelDRV88251.26 | length 63.4
  Top Layer w8: 1545,1145 U7_DriverChannelDRV88251.26@1589.84,1100.16
MOD2E2: U5.84 U7_DriverChannelDRV88252.26 | length 918.4
  Top Layer w8: 2470,1145 U7_DriverChannelDRV88252.26@2514.84,1100.16 ; 5634.71,5369.72 5754.95,5369.72 5793.26,5408.02 5978.26,5408.02 6008.26,5438.02 6008.26,5488.02 6058.26,5538.02 6348.26,5538.02 6378.26,5508.02
MOD2E3: U5.97 U7_DriverChannelDRV88253.26 | length 824.9
  Top Layer w8: 3395,1145 U7_DriverChannelDRV88253.26@3439.84,1100.16 ; 5634.71,5625.62 5790.85,5625.62 5803.26,5638.02 5953.26,5638.02 5969.28,5654.05 6384.46,5654.05
MOD2E4: U5.106 U7_DriverChannelDRV88254.26 | length 393.7
  Top Layer w8: 4250,1215 U7_DriverChannelDRV88254.26@4364.84,1100.16 ; 5634.71,5802.79 5783.49,5802.79 5795.76,5790.52 ; 6567.72,1302.55 6567.72,1367.72
MOD2E5: U5.116 U7_DriverChannelDRV88255.26 | length 618.7
  Top Layer w8: 5265,1390 5170,1295 5170,1220 U7_DriverChannelDRV88255.26@5289.84,1100.16 ; 5426.05,5913.02 5426.05,5975.82 5551.26,6101.02
MOSI: U3.7 U5.42 U10.24 | length 2104.9
  Top Layer w8: U3.7@1067.2,1462.2 U3.7@1096.81,1462.2 ; v2(2090,3170) 2115,3195 2165,3195 2183.23,3176.77 2351.57,3176.77 2384.84,3210.04 2384.84,3313.27 2368.82,3329.29 U10.24@2368.82,3385 ; v2@4963.26,4988.02 v2(4963.26,4993.02) 4963.26,5013.02 4973.3,5023.06 4973.3,5082.31 4973.3,5213.06 5008.26,5248.02 v2(5058.26,5248.02)
  Bottom Layer w8: v2(2090,3170) 2090,3130 2115,3105 ; v2(4963.26,4993.02) 4988.26,4968.02 4988.26,4868.02 ; v2(5058.26,5248.02) 5113.26,5303.02 5113.26,6253.02
Net1_2: 1.2 R22.2 R29.1
NetC4_1: C4.1 C52.1 FB3.1 L2.2 R12.2 R37.2 U2.14 | length 554.1
  Top Layer w10: v2(4858.45,2706.82) 4882.33,2706.82 4892.49,2696.66 U2.14@4907.38,2696.66 ; v2(5021.45,2488.82) R12.2@5021.45,2525.29 ; v2(5100.45,2540.82) R37.2@5100.45,2577.29
  Bottom Layer w10: v2(4815.45,2527.82) 4854.45,2488.82 v2(5021.45,2488.82) 5069.45,2488.82 5100.45,2519.82 v2(5100.45,2540.82) ; v2(4858.45,2613.82) v2(4858.45,2706.82)
NetC17_1: C17.1 C20.2 FB1.1 U10.14
NetC21_2: C21.2 FB1.2 U10.15
NetC22_1: C22.1 F4.1 U2.10 U2.11 U2.12 U2.13
NetC24_2: C24.2 U2.9
NetC43_2: C43.2 U5.141 X2.1 | length 606.6
  Top Layer w8: 4933.93,5913.02 4933.93,6428.69 4998.26,6493.02
NetC44_2: C44.2 U5.142 X2.2 | length 607.2
  Top Layer w8: 4848.65,6493.02 4914.24,6427.43 4914.24,5913.02
NetC56_2: "Logic Source1.1" C56.2 U6.14 | length 135.6
  Top Layer w22: U6.14@1294.12,3150 1385,3150 1391.56,3143.44 C56.2@1427,3143.44
NetC57_2: C57.2 R16.2 SPD1.1 U6.16 | length 205.2
  Top Layer w10: C57.2@1373.44,3250 C57.2@1377,3253.56
  Top Layer w20: SPD1.1@1294.12,3370.88 U6.16@1294.12,3250 C57.2@1373.44,3250
NetC58_2: C58.2 C59.2 U6.1 U6.3 U6.4 U6.5 USB.1 | length 739.9
  Top Layer w20: v1(800,3145) C58.2@843.56,3145 ; C58.2@847,3148.44 932.32,3148.44 U6.3@933.88,3150 ; C59.2@899.56,3321 933.88,3286.68 U6.1@933.88,3250 973,3250 997,3226 997,3176 971,3150 U6.3@933.88,3150 ; U6.5@933.88,3050 U6.4@933.88,3100 U6.3@933.88,3150
  Bottom Layer w20: USB.1@621,3030 736,3145 v1(800,3145)
NetC66_DriverChannelDRV88251_2: C66_DriverChannelDRV88251.2 R30_DriverChannelDRV88251.2 U7_DriverChannelDRV88251.3 | length 487.8
  Top Layer w8: R30_DriverChannelDRV88251.2@1275,714.53 1370.47,714.53 1380,705 v1(1415,705) ; v1(1540,700) 1540,725 1530,735 1530,778.44 1550.56,799 1570.92,799 1589.84,817.93 U7_DriverChannelDRV88251.3@1589.84,842.8
  Bottom Layer w8: v1(1415,705) 1460,660 1500,660 v1(1540,700)
NetC66_DriverChannelDRV88252_2: C66_DriverChannelDRV88252.2 R30_DriverChannelDRV88252.2 U7_DriverChannelDRV88252.3 | length 487.8
  Top Layer w8: R30_DriverChannelDRV88252.2@2200,714.53 2295.47,714.53 2305,705 v1(2340,705) ; v1(2465,700) 2465,725 2455,735 2455,778.44 2475.56,799 2495.92,799 2514.84,817.93 U7_DriverChannelDRV88252.3@2514.84,842.8
  Bottom Layer w8: v1(2340,705) 2385,660 2425,660 v1(2465,700)
NetC66_DriverChannelDRV88253_2: C66_DriverChannelDRV88253.2 R30_DriverChannelDRV88253.2 U7_DriverChannelDRV88253.3 | length 487.8
  Top Layer w8: R30_DriverChannelDRV88253.2@3125,714.53 3220.47,714.53 3230,705 v1(3265,705) ; v1(3390,700) 3390,725 3380,735 3380,778.44 3400.56,799 3420.92,799 3439.84,817.93 U7_DriverChannelDRV88253.3@3439.84,842.8
  Bottom Layer w8: v1(3265,705) 3310,660 3350,660 v1(3390,700)
NetC66_DriverChannelDRV88254_2: C66_DriverChannelDRV88254.2 R30_DriverChannelDRV88254.2 U7_DriverChannelDRV88254.3 | length 487.8
  Top Layer w8: R30_DriverChannelDRV88254.2@4050,714.53 4145.47,714.53 4155,705 v1(4190,705) ; v1(4315,700) 4315,725 4305,735 4305,778.44 4325.56,799 4345.92,799 4364.84,817.93 U7_DriverChannelDRV88254.3@4364.84,842.8
  Bottom Layer w8: v1(4190,705) 4235,660 4275,660 v1(4315,700)
NetC66_DriverChannelDRV88255_2: C66_DriverChannelDRV88255.2 R30_DriverChannelDRV88255.2 U7_DriverChannelDRV88255.3 | length 487.8
  Top Layer w8: R30_DriverChannelDRV88255.2@4975,714.53 5070.47,714.53 5080,705 v1(5115,705) ; v1(5240,700) 5240,725 5230,735 5230,778.44 5250.56,799 5270.92,799 5289.84,817.93 U7_DriverChannelDRV88255.3@5289.84,842.8
  Bottom Layer w8: v1(5115,705) 5160,660 5200,660 v1(5240,700)
NetC68_DriverChannelDRV88251_1: C68_DriverChannelDRV88251.1 U7_DriverChannelDRV88251.1 | length 82.4
  Top Layer w8: C68_DriverChannelDRV88251.1@1475,797.44 1493.31,797.44 U7_DriverChannelDRV88251.1@1538.66,842.8
NetC68_DriverChannelDRV88251_2: C68_DriverChannelDRV88251.2 U7_DriverChannelDRV88251.2 | length 146.5
  Top Layer w8: C68_DriverChannelDRV88251.2@1475,852.56 1497.56,852.56 1535,890 1555,890 1564.25,880.75 U7_DriverChannelDRV88251.2@1564.25,842.8
NetC68_DriverChannelDRV88252_1: C68_DriverChannelDRV88252.1 U7_DriverChannelDRV88252.1 | length 82.4
  Top Layer w8: C68_DriverChannelDRV88252.1@2400,797.44 2418.31,797.44 U7_DriverChannelDRV88252.1@2463.66,842.8
NetC68_DriverChannelDRV88252_2: C68_DriverChannelDRV88252.2 U7_DriverChannelDRV88252.2 | length 146.5
  Top Layer w8: C68_DriverChannelDRV88252.2@2400,852.56 2422.56,852.56 2460,890 2480,890 2489.25,880.75 U7_DriverChannelDRV88252.2@2489.25,842.8
NetC68_DriverChannelDRV88253_1: C68_DriverChannelDRV88253.1 U7_DriverChannelDRV88253.1 | length 82.4
  Top Layer w8: C68_DriverChannelDRV88253.1@3325,797.44 3343.31,797.44 U7_DriverChannelDRV88253.1@3388.66,842.8
NetC68_DriverChannelDRV88253_2: C68_DriverChannelDRV88253.2 U7_DriverChannelDRV88253.2 | length 146.5
  Top Layer w8: C68_DriverChannelDRV88253.2@3325,852.56 3347.56,852.56 3385,890 3405,890 3414.25,880.75 U7_DriverChannelDRV88253.2@3414.25,842.8
NetC68_DriverChannelDRV88254_1: C68_DriverChannelDRV88254.1 U7_DriverChannelDRV88254.1 | length 82.4
  Top Layer w8: C68_DriverChannelDRV88254.1@4250,797.44 4268.31,797.44 U7_DriverChannelDRV88254.1@4313.66,842.8
NetC68_DriverChannelDRV88254_2: C68_DriverChannelDRV88254.2 U7_DriverChannelDRV88254.2 | length 146.5
  Top Layer w8: C68_DriverChannelDRV88254.2@4250,852.56 4272.56,852.56 4310,890 4330,890 4339.25,880.75 U7_DriverChannelDRV88254.2@4339.25,842.8
NetC68_DriverChannelDRV88255_1: C68_DriverChannelDRV88255.1 U7_DriverChannelDRV88255.1 | length 82.4
  Top Layer w8: C68_DriverChannelDRV88255.1@5175,797.44 5193.31,797.44 U7_DriverChannelDRV88255.1@5238.66,842.8
NetC68_DriverChannelDRV88255_2: C68_DriverChannelDRV88255.2 U7_DriverChannelDRV88255.2 | length 146.5
  Top Layer w8: C68_DriverChannelDRV88255.2@5175,852.56 5197.56,852.56 5235,890 5255,890 5264.25,880.75 U7_DriverChannelDRV88255.2@5264.25,842.8
NetC71_DriverChannelDRV88251_2: C71_DriverChannelDRV88251.2 U7_DriverChannelDRV88251.15 | length 98.6
  Top Layer w8: U7_DriverChannelDRV88251.15@1871.34,1067.2 1871.34,1116.34 1897.44,1142.44 C71_DriverChannelDRV88251.2@1910,1142.44
NetC71_DriverChannelDRV88252_2: C71_DriverChannelDRV88252.2 U7_DriverChannelDRV88252.15 | length 98.6
  Top Layer w8: U7_DriverChannelDRV88252.15@2796.34,1067.2 2796.34,1116.34 2822.44,1142.44 C71_DriverChannelDRV88252.2@2835,1142.44
NetC71_DriverChannelDRV88253_2: C71_DriverChannelDRV88253.2 U7_DriverChannelDRV88253.15 | length 98.6
  Top Layer w8: U7_DriverChannelDRV88253.15@3721.34,1067.2 3721.34,1116.34 3747.44,1142.44 C71_DriverChannelDRV88253.2@3760,1142.44
NetC71_DriverChannelDRV88254_2: C71_DriverChannelDRV88254.2 U7_DriverChannelDRV88254.15 | length 98.6
  Top Layer w8: U7_DriverChannelDRV88254.15@4646.34,1067.2 4646.34,1116.34 4672.44,1142.44 C71_DriverChannelDRV88254.2@4685,1142.44
NetC71_DriverChannelDRV88255_2: C71_DriverChannelDRV88255.2 U7_DriverChannelDRV88255.15 | length 98.6
  Top Layer w8: U7_DriverChannelDRV88255.15@5571.34,1067.2 5571.34,1116.34 5597.44,1142.44 C71_DriverChannelDRV88255.2@5610,1142.44
NetD7_2: D7.2 R8.1 | length 58.5
  Top Layer w15: R8.1@5356.54,2280 D7.2@5415,2280
NetD9_2: D9.2 R11.1 | length 70.5
  Top Layer w10: R11.1@5033.45,2347.51 5103.87,2347.51 D9.2@5103.94,2347.59
NetD10_1: D10.1 FAN-1.2 Q2.3 R14.2
NetD10_2: D10.2 R13.2
NetD11_1: D11.1 FAN-2.2 Q3.3
NetD11_2: D11.2 R47.2 R48.2
NetD12_1: D12.1 D13.1 FETS.2 Q4.5 R57.2
NetD13_2: D13.2 R56.1 | length 54.1
  Top Layer w8: D13.2@353.5,3693.23 D13.2@355,3694.72
  Top Layer w15: D13.2@355,3694.72 R56.1@355,3746.69
NetD14_1: D14.1 D15.1 FETS.4 Q5.5 R61.2
NetD14_2: D14.2 R60.1 | length 52
  Top Layer w15: D14.2@755,3694.72 R60.1@755,3746.69
NetD16_1: D16.1 D17.1 FETS.6 Q6.5 R65.2
NetD16_2: D16.2 R64.1
NetD18_1: D18.1 D19.1 FETS.8 Q7.5 R69.2
NetD18_2: D18.2 R68.1
NetEXP0_9: EXP0.9
NetEXP0_10: EXP0.10
NetEXP0_11: EXP0.11
NetEXP0_12: EXP0.12
NetEXP0_13: EXP0.13
NetEXP0_14: EXP0.14
NetEXP0_15: EXP0.15
NetEXP0_16: EXP0.16
NetEXP0_17: EXP0.17
NetEXP0_18: EXP0.18
NetEXP0_19: EXP0.19
NetEXP0_20: EXP0.20
NetEXP0_21: EXP0.21
NetEXP0_22: EXP0.22
NetEXP0_23: EXP0.23
NetEXP0_24: EXP0.24
NetEXP0_25: EXP0.25
NetEXP0_26: EXP0.26
NetEXP0_27: EXP0.27
NetEXP0_28: EXP0.28
NetEXP0_29: EXP0.29
NetEXP0_30: EXP0.30
NetEXP0_31: EXP0.31
NetEXP0_32: EXP0.32
NetEXP0_33: EXP0.33
NetEXP0_34: EXP0.34
NetEXP0_35: EXP0.35
NetEXP0_36: EXP0.36
NetEXP0_37: EXP0.37
NetEXP0_38: EXP0.38
NetEXP0_39: EXP0.39
NetEXP0_40: EXP0.40
NetF1_1: "Power Input1.3" F1.1
NetF2_1: "Power Input1.1" F2.1
NetF3_1: "Power Input1.5" F3.1
NetF4_2: "Logic Source1.2" F4.2 | length 239.5
  Top Layer w40: 4757.45,2992.55 4816.5,3051.61 F4.2@4972.45,3051.61
NetL2_1: L2.1 U2.1 U2.2 U2.3
NetM1_DriverChannelDRV88251_1: M1_DriverChannelDRV88251.1 U7_DriverChannelDRV88251.5 | length 703.4
  Top Layer w14: v1(1641.02,780) U7_DriverChannelDRV88251.5@1641.02,842.8
  Bottom Layer w39: M1_DriverChannelDRV88251.1@1555,175 1555,230 1610,285 1610,748.98 v1(1641.02,780)
NetM1_DriverChannelDRV88251_2: M1_DriverChannelDRV88251.2 U7_DriverChannelDRV88251.7 | length 683.2
  Top Layer w14: v1(1680,740) 1692.2,752.2 U7_DriverChannelDRV88251.7@1692.2,842.8
  Bottom Layer w39: M1_DriverChannelDRV88251.2@1655,175 1655,715 v1(1680,740)
NetM1_DriverChannelDRV88251_3: M1_DriverChannelDRV88251.3 U7_DriverChannelDRV88251.8 | length 665.9
  Top Layer w14: 1717.8,753.23 U7_DriverChannelDRV88251.8@1717.8,842.8
  Bottom Layer w39: v1(1730,741.02) 1755,716.02 M1_DriverChannelDRV88251.3@1755,175
NetM1_DriverChannelDRV88251_4: M1_DriverChannelDRV88251.4 U7_DriverChannelDRV88251.10 | length 700
  Top Layer w14: v1@1768.98,782.98 U7_DriverChannelDRV88251.10@1768.98,842.8
  Bottom Layer w39: v1(1770,780) 1800,750 1800,290 1855,235 M1_DriverChannelDRV88251.4@1855,175
NetM1_DriverChannelDRV88252_1: M1_DriverChannelDRV88252.1 U7_DriverChannelDRV88252.5 | length 703.4
  Top Layer w14: v1(2566.02,780) U7_DriverChannelDRV88252.5@2566.02,842.8
  Bottom Layer w39: M1_DriverChannelDRV88252.1@2480,175 2480,230 2535,285 2535,748.98 v1(2566.02,780)
NetM1_DriverChannelDRV88252_2: M1_DriverChannelDRV88252.2 U7_DriverChannelDRV88252.7 | length 683.2
  Top Layer w14: v1(2605,740) 2617.2,752.2 U7_DriverChannelDRV88252.7@2617.2,842.8
  Bottom Layer w39: M1_DriverChannelDRV88252.2@2580,175 2580,715 v1(2605,740)